# Altium PCB LEDLightRing_2812.PcbDoc
Units mm, origin at the board's own origin, x right, y up, seen from the top; angles counter-clockwise.
Board outline 57.4 x 57.4 mm, 3 copper layers (Top Layer, Jumper, Bottom Layer); 21 components, 19 nets, 99 pads, 18 vias.
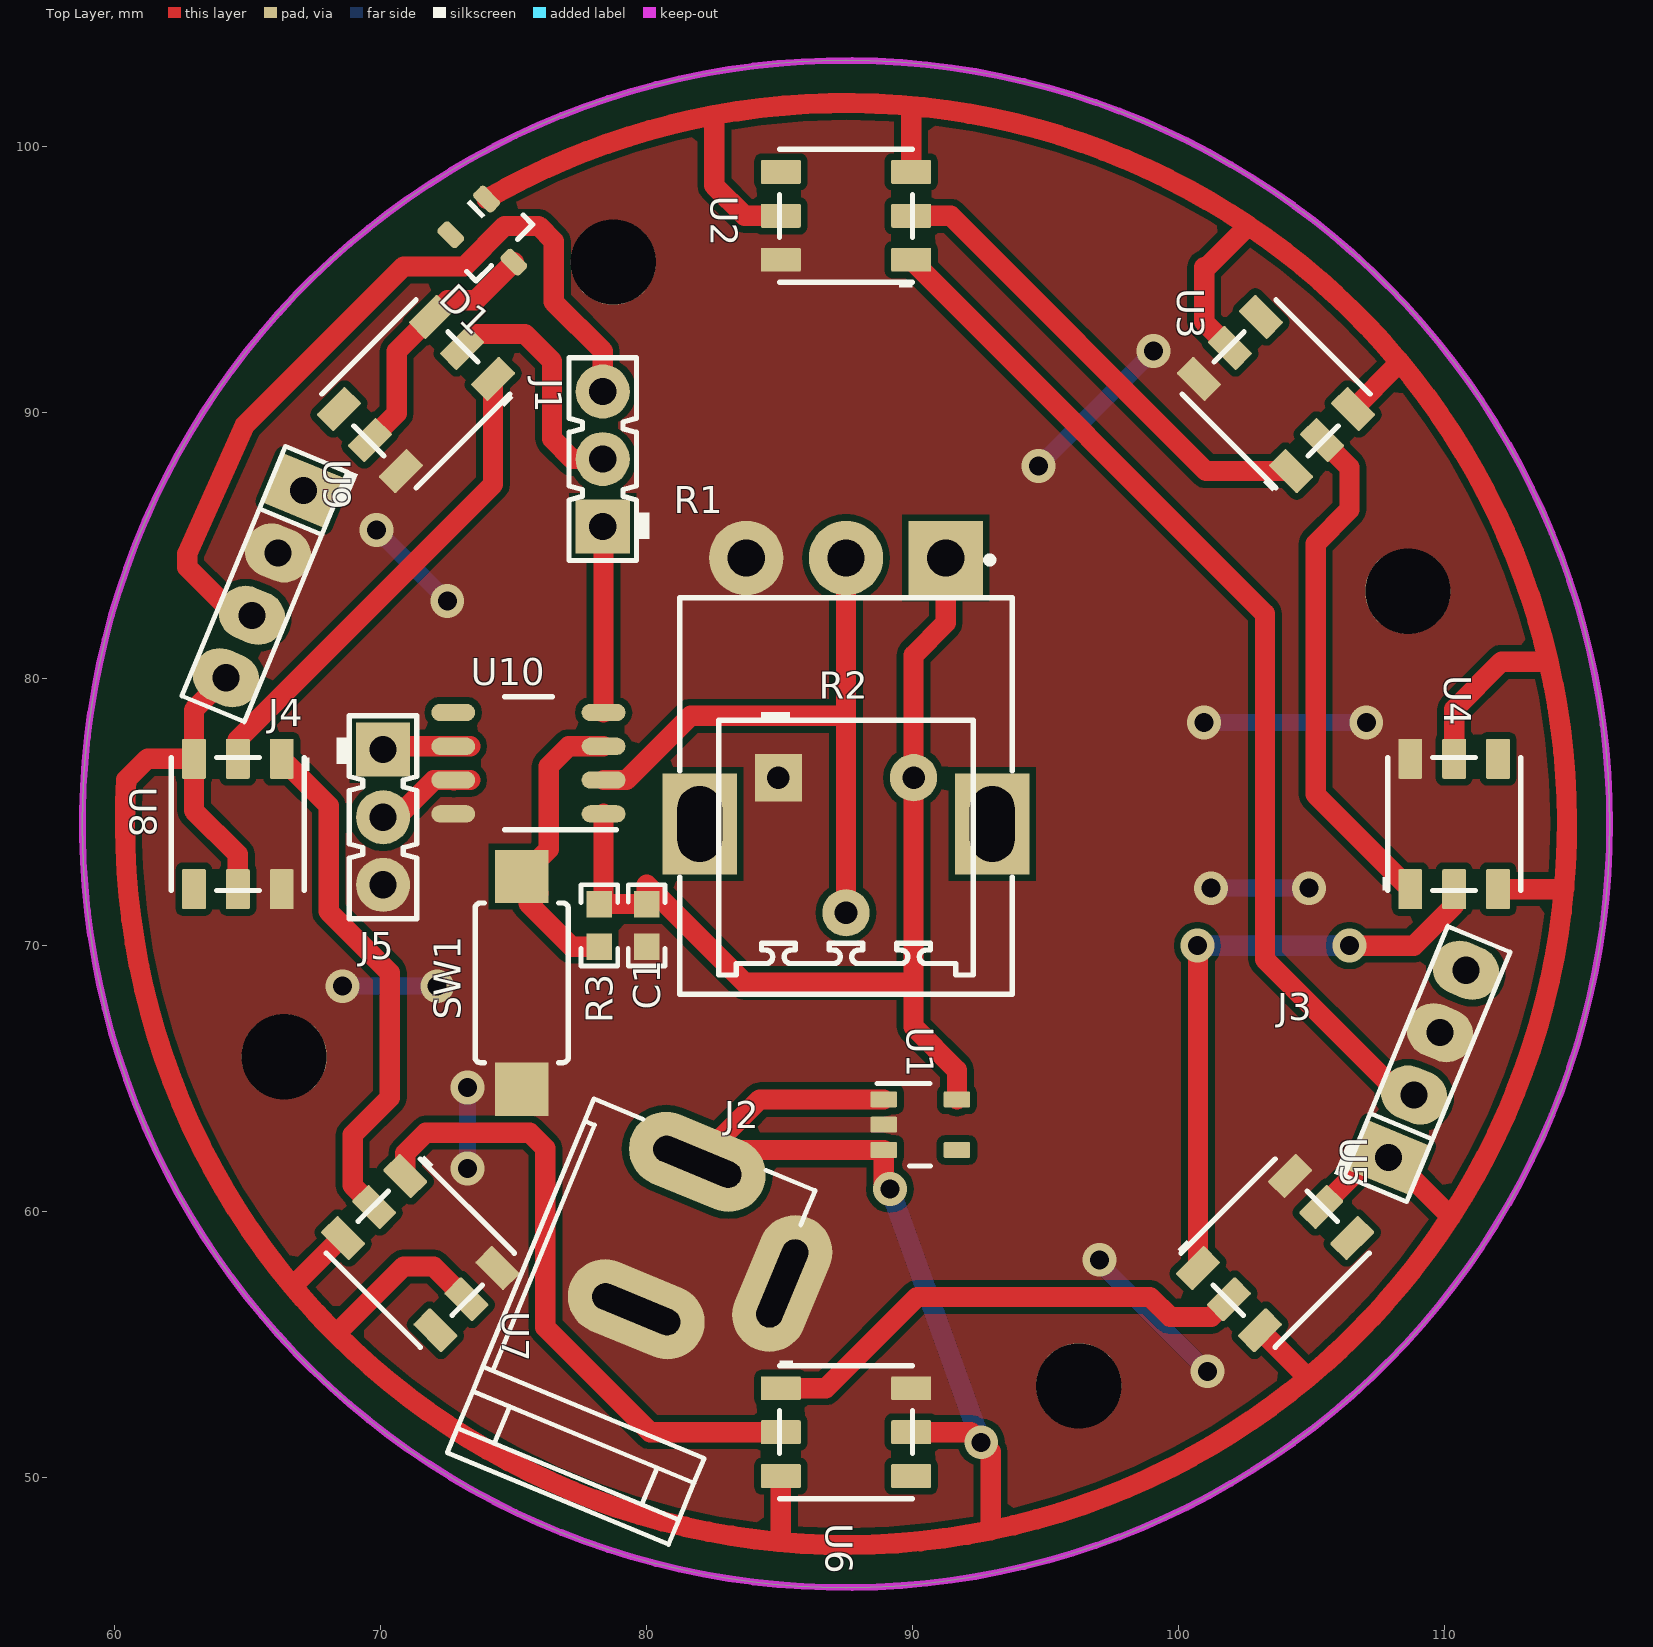
[diagram p0: Top Layer view]
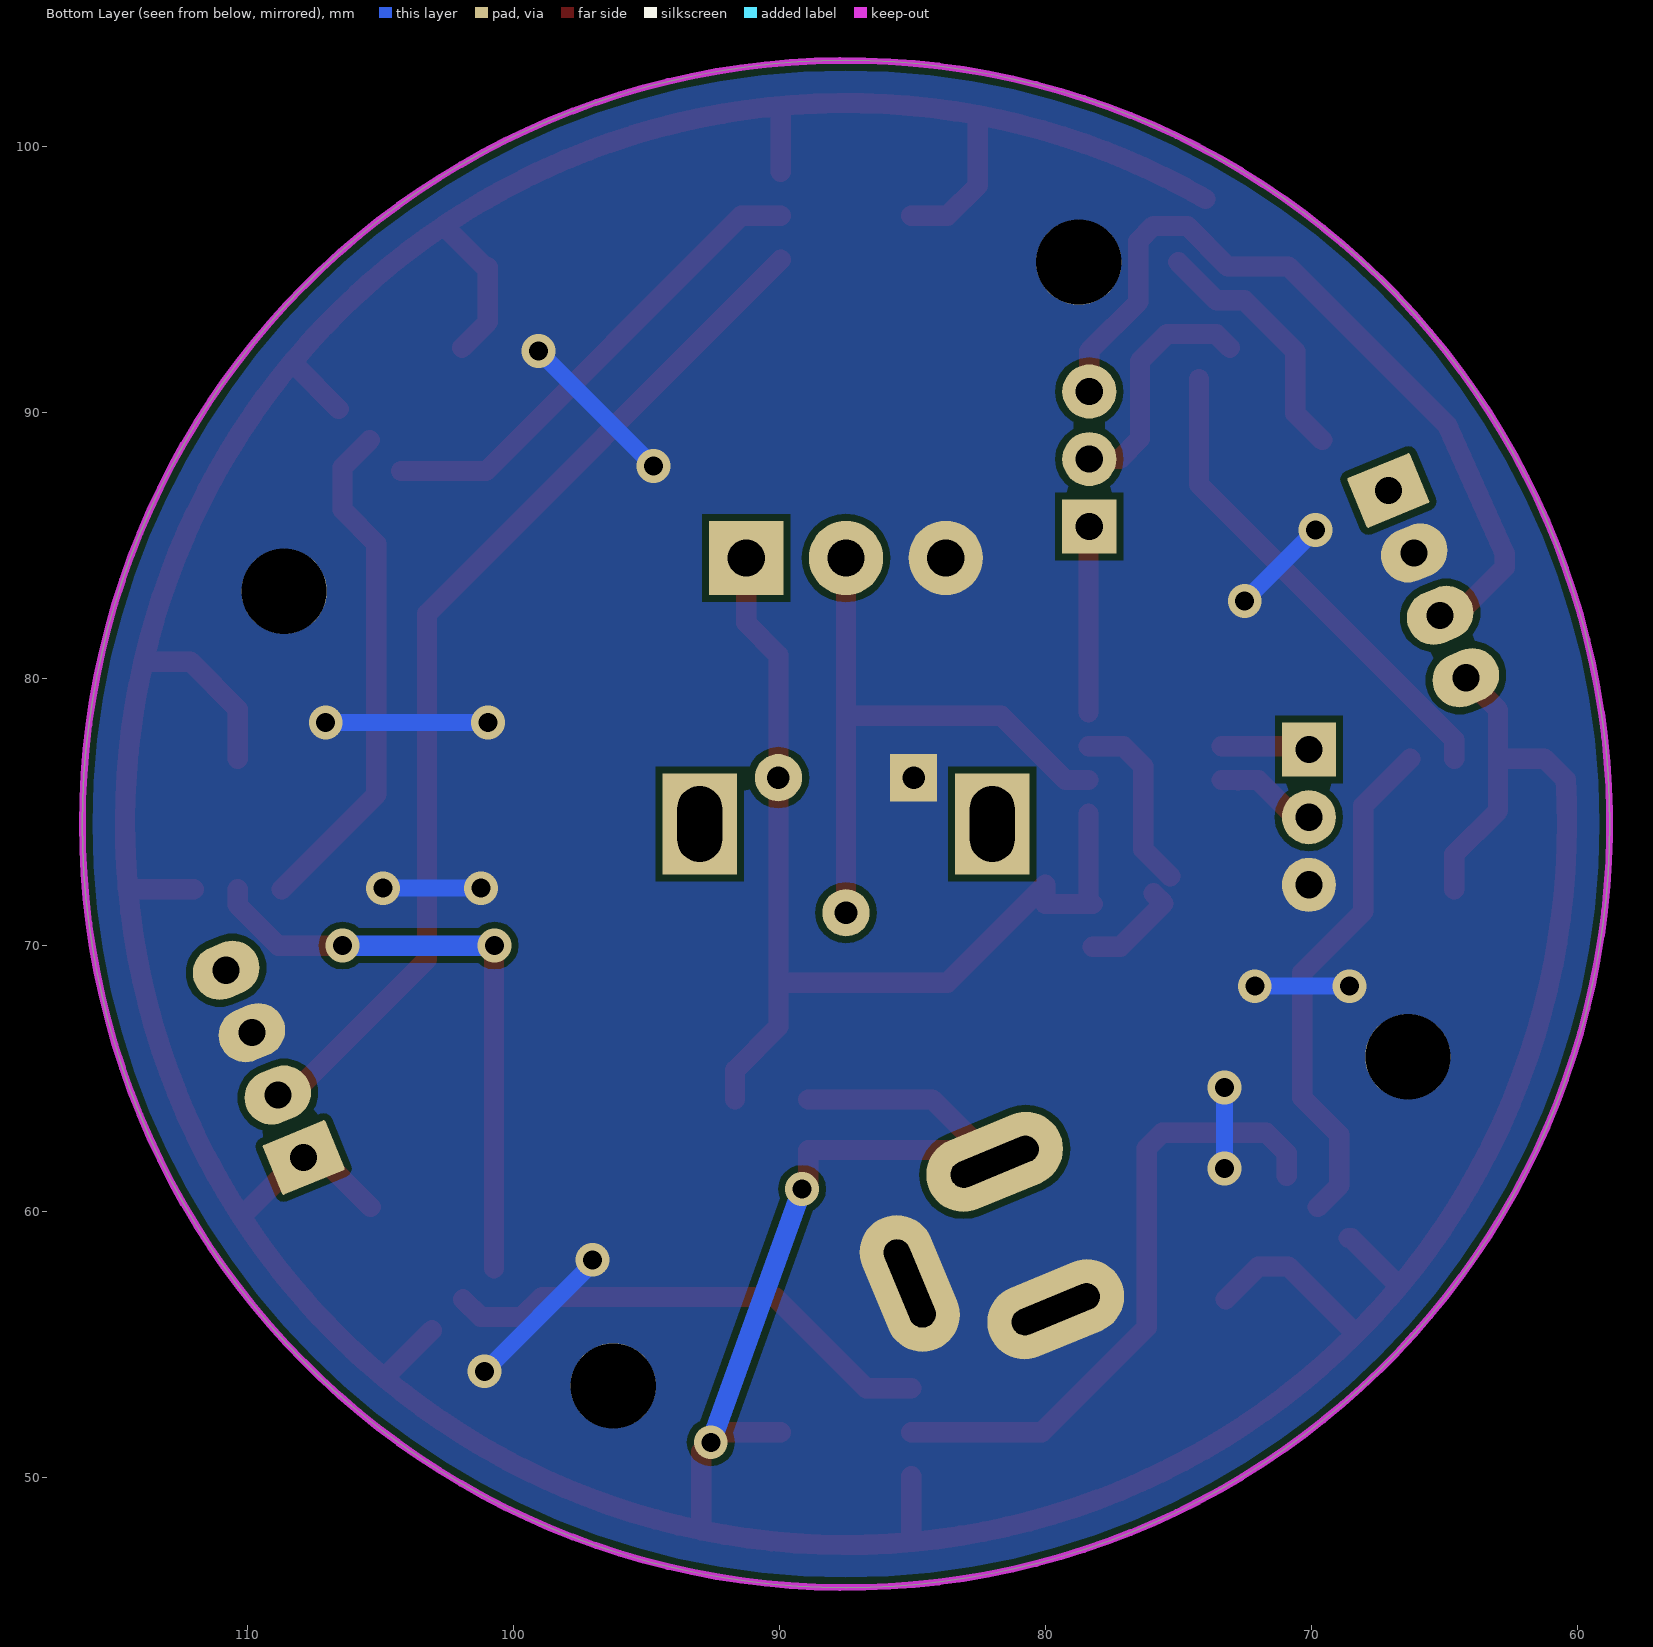
[diagram p1: Bottom Layer view, seen from below]

## Layer stack, top to bottom
Top Solder: solder mask 0.0102, Solder Resist, Dk 3.5
Top Layer: signal copper 0.0356
Dielectric1: core 0.32, FR-4, Dk 4.8
Jumper: signal copper 0.0356
Dielectric2: prepreg 0.32, FR-4, Dk 4.8
Bottom Layer: signal copper 0.0356
Bottom Solder: solder mask 0.0102, Solder Resist, Dk 3.5

## Board outline
58.801,74.549 ccw(c87.503,74.549) 87.503,45.847 ccw(c87.503,74.549) 116.205,74.549 ccw(c87.503,74.549) 87.503,103.251 ccw(c87.503,74.549)

## Design rules (kind name [scope] priority, off if disabled: settings)
Clearance [All] p1: gap=0.254 ignorepadtopadclearanceinfootprint=FALSE except(0: Arc-Hole Track-Hole SMDPad-Hole THPad-Hole Via-Hole Fill-Hole Poly-Hole Region-Hole Text-Hole)
ComponentClearance [All] p1 off: gap=0.254 collisioncheckmode=3 verticalgap=0.254 showdistances=FALSE
DiffPairsRouting [All] p1 off: maxlimit=0.254 minlimit=0.254 mostfreqgap=0.254 toplayer_minwidth=0.381 toplayer_maxwidth=0.381 toplayer_prefwidth=0.381 midlayer1_minwidth=0.381 midlayer1_maxwidth=0.381 midlayer1_prefwidth=0.381 bottomlayer_minwidth=0.381 bottomlayer_maxwidth=0.381 bottomlayer_prefwidth=0.381 maxuncoupledlength=12.7
FanoutControl Fanout_BGA [IsBGA] p1 off: bgadir=Out bgaviamode=Centered fanoutstyle=Auto fanoutdirection=Alternating viagrid=0.025 // Fanout_BGA (Default Rule)
FanoutControl Fanout_LCC [IsLCC] p2 off: bgadir=Out bgaviamode=Centered fanoutstyle=Auto fanoutdirection=Alternating viagrid=0.025 // Fanout_LCC (Default Rule)
FanoutControl Fanout_SOIC [IsSOIC] p3 off: bgadir=Out bgaviamode=Centered fanoutstyle=Auto fanoutdirection=Alternating viagrid=0.025 // Fanout_SOIC (Default Rule)
FanoutControl Fanout_Small [(CompPinCount < 5)] p4 off: bgadir=Out bgaviamode=Centered fanoutstyle=Auto fanoutdirection=OutThenIn viagrid=0.025 // Fanout_Small (Default Rule)
FanoutControl Fanout_Default [All] p5 off: bgadir=Out bgaviamode=Centered fanoutstyle=Auto fanoutdirection=Alternating viagrid=0.025 // Fanout_Default (Default Rule)
Height [All] p1 off: minheight=0 maxheight=25.4 prefheight=12.7
PlaneClearance [All] p1 off: clearance=0.508
PolygonConnect [All] p1: connectstyle=Direct reliefconductorwidth=0.254 reliefentries=4 polygonreliefangle="90 Angle" airgapwidth=0.254
RoutingCorners [All] p1 off: cornerstyle=45-Degree minsetback=2.54 maxsetback=2.54
RoutingLayers [All] p1 off: top layer_v5=TRUE mid layer 1_v5=TRUE bottom layer_v5=TRUE
RoutingPriority [All] p1 off: routingpriority=0
RoutingTopology [All] p1 off: topology=Shortest
RoutingVias [All] p1: holewidth=0.711 width=1.27 viastyle="Through Hole" minholewidth=0.711 minwidth=1.27 maxholewidth=0.711 maxwidth=1.27
SilkToSolderMaskClearance SilkscreenOverComponentPads [IsPad] p1: minsilkscreentomaskgap=0.254 clearancetoexposedcopper=TRUE
SolderMaskExpansion [All] p1: expansion=0.102
Width [All] p1: maxlimit=2.54 minlimit=0.508 preferedwidth=0.508
16 further rules are at their usual default settings.

## Classes and differential pairs
component class Header: J1 J3 J4 J5

## Components (designator, comment, footprint, x,y, rotation, side; value= is the part's Value field where it differs from the comment)
C1 "UMK107AB7105KA-T" 0603 80.01,70.739 r270 top
D1 "MMBD914" SOT-23 74.168,96.52 r315 top
J1 "TSW-103-07-T-S" Samtec_TSW-103-07-T-S 78.359,88.265 r90 top
J2 "PJ-202AH" CONN_CUI-PJ-202AH 81.915,61.849 r247.5 top
J3 "TSW-104-07-G-S" TSW-104-07-G-S 109.347,65.532 r67.5 top
J4 "TSW-104-07-G-S" TSW-104-07-G-S 65.659,83.566 r247.5 top
J5 "TSW-103-07-T-S" Samtec_TSW-103-07-T-S 70.104,74.803 r270 top
R1 "296UD104B1N" CTS_296UD 87.503,74.549 r270 top
R2 "3386F-1-104TLF" Bourns_3386F-T 87.503,73.66 r0 top
R3 "CRCW060310K0JNEA" 0603 78.232,70.739 r270 top
SW1 "RS-032G05A3-SM RT" SW_RS-032G05A3-SM 75.311,68.58 r90 top
U1 "TPS73633DBV" DBV0005A_N 90.297,63.246 r0 top
U2 "WS2812" WS2812 87.503,97.409 r180 top
U3 "WS2812" WS2812 103.667,90.713 r135 top
U4 "WS2812" WS2812 110.363,74.549 r90 top
U5 "WS2812" WS2812 103.632,58.42 r45 top
U6 "WS2812" WS2812 87.503,51.689 r0 top
U7 "WS2812" WS2812 71.501,58.42 r315 top
U8 "WS2812" WS2812 64.643,74.549 r270 top
U9 "WS2812" WS2812 71.339,90.713 r225 top
U10 "MSP430G2230QDREP" D0008A_M 75.565,76.835 r180 top

## Footprints (in the part's own frame and the unit in brackets; to place one, negate y for a bottom-side part, rotate by r counter-clockwise, add the part's x,y. Pads: shape width x height; smd on the part's side, far side on the other; paste and mask are expansions set on the pad)
0603 [mm] "0603 from SM-752 data"
  rect 1x0.95 smd: 1(-0.8,0) 2(0.8,0)
  silkscreen extent -1.52,-0.69 1.52,0.69, body extent -0.87,-0.47 0.87,0.47, height 1
Bourns_3386F-T [mil] "TH, 3-Leads, Body 9.53x9.53mm"
  rect 70x70 hole 33.46: 1(-100,103.63)
  round 70 hole 33.46: 2(0,-96.37) 3(100,103.63)
  silkscreen extent -188,-189 188,201, body extent -189,-188 188,189, height 415
CONN_CUI-PJ-202AH [mm] "Conn_DC Jack"
  oval 2.794x5.334 hole 1 slot 3.5 at 90 deg: 1(0,0) 2(6,0)
  oval 5.334x2.794 hole 1 slot 3.5 at 180 deg: 3(3,4.7)
  silkscreen extent -0.7,-4.5 13.7,4.5, body extent -0.7,-4.5 13.7,4.9, height 11.02
CTS_296UD [mm] "TH, 3-Leads, Body 12.5x12.8mm, Height 23.2mm"
  rect 2.794x2.794 hole 1.4: 1(-10,3.75)
  round 2.794 hole 1.4: 2(-10,0) 3(-10,-3.75)
  rect 3.81x2.794 hole 1.68 slot 2.85 at 0 deg: MH1(0,5.5) MH2(0,-5.5)
  silkscreen extent -10.05,-6.25 6.4,6.25, body extent -10.2,-6.25 6.4,6.25, height 8.7
D0008A_M [mm] "SOIC, 8-Leads, Body 4.9x3.9mm, Pitch 1.27mm, IPC Low Density"
  oval 1.65x0.65 smd: 1(-2.825,1.905) 2(-2.825,0.635) 3(-2.825,-0.635) 4(-2.825,-1.905) 5(2.825,-1.905) 6(2.825,-0.635) 7(2.825,0.635) 8(2.825,1.905)
  silkscreen extent -3.3,-2.5 0.9,2.5, body extent -3,-2.45 3,2.45, height 1.63
DBV0005A_N [mm] "SOT23, 5-Leads, Body 2.9x1.6mm, Pitch 0.95mm, Lead Span 2.8mm, IPC Medium Density"
  rrect17% 1x0.6 smd: 1(-1.375,0.95) 2(-1.375,0) 3(-1.375,-0.95) 4(1.375,-0.95) 5(1.375,0.95)
  silkscreen extent -1.63,-1.55 0.38,1.55, body extent -1.42,-1.46 1.42,1.46, height 1.09
Samtec_TSW-103-07-T-S [mil] "Header, 2.54 mm, 3x1, TH"
  rect 80x80 hole 40.16: 1(-100,0)
  round 80 hole 40.16: 2(0,0) 3(100,0)
  silkscreen extent -150,-69 150,50, body extent -150,-50 150,50, height 330
SOT-23 [mm] "SOT23, 3-Leads, Body 2.9x1.3mm, Pitch 0.95mm, Lead Span 2.5mm, IPC Medium Density"
  rrect50% 1x0.6 smd: 1(-1.2,0.95) 2(-1.2,-0.95) 3(1.2,0)
  silkscreen extent -1.63,-1.5 0.7,1.5, body extent -1.16,-1.45 1.21,1.45, height 1
SW_RS-032G05A3-SM [mm] "SMT, 2-Leads, Body 6x3.5mm, Pin Spacing 8mm"
  rect 2x2 smd: 1(-4,0) 2(4,0)
  silkscreen extent -3,-1.75 3,1.75, body extent -4,-1.75 4,1.75, height 4.3
TSW-104-07-G-S [mil] "Samtec 100mil, 1x4, 230 mil above insulator"
  rrect6% 80x100 hole 40: 1(-150,0)
  oval 80x100 hole 40: 2(-50,0) 3(50,0) 4(150,0)
  silkscreen extent -203,-50 200,65, body extent -200,-50 200,50, height 330
WS2812 [mm]
  rrect11% 1.5x0.9 smd: 1(-2.45,1.65) 2(-2.45,-0.001) 3(-2.45,-1.65) 4(2.45,-1.65) 5(2.45,-0.001) 6(2.45,1.65)
  silkscreen extent -2.5,-2.5 2.5,2.7, body extent -2.7,-2.5 2.7,2.5, height 1.67

## Part data
C1: "CAP, CERM, 1 µF, 50 V, +/- 10%, X7R, 0603"
D1: "Diode, P-N, 100 V, 0.2 A, SOT-23"
J1 J5: "Header, 2.54 mm, 3x1, Tin, TH"
J2: "Connector, DC Jack 2.1X5.5 mm, TH"
J3 J4: "Header, 100mil, 4x1, Gold, TH"
R1: "Trimmer, 100k ohms, 0.15 W, TH"
R2: library part 3386F-1-103TLF, "TRIMMER 100K OHM 0.5W, TH"
R3: "RES, 10 k, 5%, 0.1 W, 0603"
SW1: "Switch, Tactile, SPST-NO, 0.05A, 12V, SMD"
U1: "Cap-Free, NMOS, 400mA Low-Dropout Regulator with Reverse Current Protection, DBV0005A"
U2 U3 U4 U5 U6 U7 U8 U9: "Intelligent Control LED Integrated Light Source"
U10: "Enhanced Product 16-bit Ultra-Low-Power Mixed Signal Microcontroller, 2kB Flash, 128B RAM, D0008A (SOIC-8)"

## Free pads (board coordinates)
  round 3.2 hole 3.2: 0(66.383,65.801) 0(78.755,95.669) 0(96.251,53.429) 0(108.623,83.297)

## Via types
v1: diameter 1.27, hole 0.711, Top Layer to Bottom Layer, 18 vias

## Nets (pads, with @x,y where several pads share a name; then routed paths per layer and width w, separated by ;. In a path a pad name is that pad's centre, name@x,y a point inside that pad or via, vN(x,y) a via of type N, cw(c..) or ccw(c..) an arc to the next point about the centre after c; other vN are vias at no path point)
GND: C1.2 J2.2 J2.3 J3.3 J4.2 J5.3 pad.0 R1.3 R2.1 SW1.1 U1.2 U2.6 U3.6 U4.6 U5.6 U6.6 U7.6 U8.6 U9.6 U10.8 | length 32.3
  Top Layer w0.635: v1(68.58,68.453) v1@68.707,68.453
  Bottom Layer w0.635: v1(68.58,68.453) v1(72.136,68.453) ; v1(69.85,85.598) v1(72.517,82.931) ; v1(73.279,61.595) v1(73.279,64.643) ; v1(94.742,88.011) v1(99.06,92.329) ; v1(97.028,58.166) 97.028,58.039 v1(101.092,53.975) ; v1(100.965,78.359) v1(107.061,78.359) ; v1(101.219,72.136) v1(104.902,72.136)
NetD1_3: D1.3 U9.3 U9.5 | length 9.5
  Top Layer w0.762: U9.5 70.612,89.988 70.612,92.32 U9.3 72.526,94.234 73.579,94.234 D1.3
NetJ1_1: J1.1 U10.4 | length 7
  Top Layer w0.762: J1.1 78.39,85.694 78.39,79.375 U10.4
NetJ1_2: J1.2 U9.2 | length 9.2
  Top Layer w0.762: U9.2 73.588,92.964 75.438,92.964 76.454,91.948 76.454,89.027 77.216,88.265 J1.2
NetJ1_3: J1.3 J4.3 | length 30.4
  Top Layer w0.762: J4.3 64.546,82.393 62.738,84.201 62.738,84.709 64.897,89.535 70.866,95.504 73.152,95.504 74.676,97.028 75.946,97.028 76.52,96.454 76.52,94.168 78.359,92.329 J1.3
NetJ3_2: J3.2 U2.1 | length 39.5
  Top Layer w0.762: U2.1 103.251,82.461 103.251,69.469 108.361,64.359 J3.2
NetJ5_1: J5.1 U10.6 | length 3.2
  Top Layer w0.762: J5.1@70.231,77.343 70.358,77.47 U10.6@73.375,77.47
NetJ5_2: J5.2 U10.7 | length 3.8
  Top Layer w0.762: J5.2 70.612,74.803 72.009,76.2 U10.7 ; U10.7@72.756,76.185 72.771,76.2 U10.7@73.375,76.2
NetR1_2: R1.2 R2.2 U10.2 | length 23.4
  Top Layer w0.762: U10.2 79.248,76.2 81.661,78.613 87.503,78.613 ; R2.2 87.503,78.613 ; R1.2 87.503,78.613
NetR3_2: R3.2 SW1.2 U10.3 | length 10.8
  Top Layer w0.762: SW1.2 76.327,73.596 76.327,76.72 77.077,77.47 U10.3 ; SW1.2@75.946,71.945 75.565,71.564 77.19,69.939 R3.2
NetU2_2: U2.2 U3.1 | length 18.3
  Top Layer w0.762: U2.2 91.439,97.41 101.035,87.814 U3.1
NetU3_2: U3.2 U4.1 | length 19.3
  Top Layer w0.762: U3.2 106.426,87.956 106.426,86.36 105.156,85.09 105.156,75.656 U4.1
NetU4_2: U4.2 U5.1 | length 23
  Top Layer w0.762: v1(100.711,69.977) 100.733,69.955 U5.1 ; v1(106.426,69.977) 108.839,69.977 110.364,71.502 U4.2
  Bottom Layer w0.762: v1(100.711,69.977) v1(106.426,69.977)
NetU5_2: U5.2 U6.1 | length 18.9
  Top Layer w0.762: U6.1 86.74,53.339 90.17,56.769 98.933,56.769 99.683,56.019 101.233,56.019 U5.2
NetU6_2: U6.2 U7.1 | length 23.9
  Top Layer w0.762: U7.1 70.935,62.172 71.708,62.945 75.612,62.945 76.2,62.357 76.2,55.626 80.138,51.688 U6.2
NetU7_2: U7.2 U8.1 | length 19.4
  Top Layer w0.762: U8.1 68.06,75.232 68.06,71.259 70.358,68.961 70.358,64.262 68.961,62.865 68.961,60.959 U7.2
NetU8_2: U8.2 U9.1 | length 18.3
  Top Layer w0.762: U8.2 64.642,77.723 74.238,87.319 U9.1
P3V3: C1.1 R1.1 R2.3 R3.1 U1.5 U10.1 | length 39
  Top Layer w0.762: U10.1 78.39,71.697 R3.1 C1.1 80.01,72.263 83.693,68.58 90.043,68.58 ; R1.1 91.253,82.109 90.043,80.899 R2.3 90.043,68.58 ; U1.5 91.672,65.3 90.043,66.929 90.043,68.58
P5V: D1.1 J2.1 J3.1 J4.4 U1.1 U1.3 U2.3 U2.5 U3.3 U3.5 U4.3 U4.5 U5.3 U5.5 U6.3 U6.5 U7.3 U7.5 U8.3 U8.5 | length 235.6
  Top Layer w0.762: 60.406,74.076 cw(c87.503,74.549) 60.402,74.549 ; 60.406,75.022 ccw(c87.503,74.549) 60.402,74.549 ; J4.4 62.993,78.838 U8.3 ; U8.5 64.642,73.407 62.993,75.056 U8.3 ; U7.3 68.515,58.986 66.704,57.174 ; U7.5 72.008,57.912 70.866,57.912 68.339,55.385 ; D1.1 cw(c87.503,74.549) 82.555,101.195 ; J2.1 J2.1@82.362,62.296 ; U6.3 85.053,47.65 84.969,47.566 ; U2.5 83.692,97.41 82.555,98.547 82.555,101.195 ; U1.1 84.262,64.196 J2.1@82.362,62.296 ; v1(89.154,60.833) 88.922,61.065 U1.3 J2.1@82.362,62.296 ; U6.5 92.203,51.688 v1(92.583,51.308) 92.94,50.951 92.94,47.999 ; U2.3 89.953,101.501 ; U3.5 100.965,93.417 100.965,95.479 101.063,95.479 102.624,97.04 ; U5.3 104.837,53.75 104.878,53.75 ; U5.5 107.225,62.012 J3.1 108.009,62.012 110.232,59.789 ; 106.329,55.054 ccw(c87.503,74.549) 106.667,55.385 ; U3.3 108.25,91.831 108.25,91.986 ; 106.998,55.723 cw(c87.503,74.549) 106.667,55.385 ; U4.5 110.364,78.868 112.139,80.643 113.91,80.643 ; U4.3 114.465,72.099 114.496,72.13 ; 60.402,74.549 cw(c87.503,74.549) 60.452,76.208 61.244,76.999 U8.3 ; 60.402,74.549 ccw(c87.503,74.549) 66.704,57.174 ; 66.704,57.174 ccw(c87.503,74.549) 68.008,55.723 ccw(c87.503,74.549) 68.339,55.385 ; 68.339,55.385 ccw(c87.503,74.549) 72.529,51.96 ccw(c87.503,74.549) 84.969,47.566 ; 82.555,101.195 cw(c87.503,74.549) 102.624,97.04 ; 84.969,47.566 ccw(c87.503,74.549) 92.94,47.999 ; 92.94,47.999 ccw(c87.503,74.549) 104.878,53.75 ; 102.624,97.04 cw(c87.503,74.549) 108.25,91.986 ; 104.878,53.75 ccw(c87.503,74.549) 106.667,55.385 ; 106.667,55.385 ccw(c87.503,74.549) 110.232,59.789 ; 108.25,91.986 cw(c87.503,74.549) 113.91,80.643 ; 110.232,59.789 ccw(c87.503,74.549) 114.496,72.13 ; 113.91,80.643 cw(c87.503,74.549) 114.496,72.13
  Bottom Layer w0.762: v1(89.154,60.833) v1(92.583,51.308)
pads on no net: D1.2 J3.4 J4.1 R1.MH1 R1.MH2 U1.4 U2.4 U3.4 U4.4 U5.4 U6.4 U7.4 U8.4 U9.4 U10.5

## Polygon pours and split planes (outlines as drawn)
GND on Top Layer "TOP_LAYER_GND_P000" (solid, remove dead copper, pour order 0): 58.42,103.632 116.586,103.632 116.586,45.466 58.42,45.466
GND on Bottom Layer "GND_L03_P002" (solid, remove dead copper, pour order 2): 58.332,103.759 116.498,103.759 116.498,45.593 58.332,45.593

## Keep-outs
Keep-Out Layer:
  circle w0.254: c87.503,74.549 r28.702

## Silkscreen, mask and mechanical layers (free items; w line width, h text height)
Mechanical 1:
  circle w0.254: c87.503,74.549 r28.702